# EAGLE board quad (EAGLE 7.5.0)
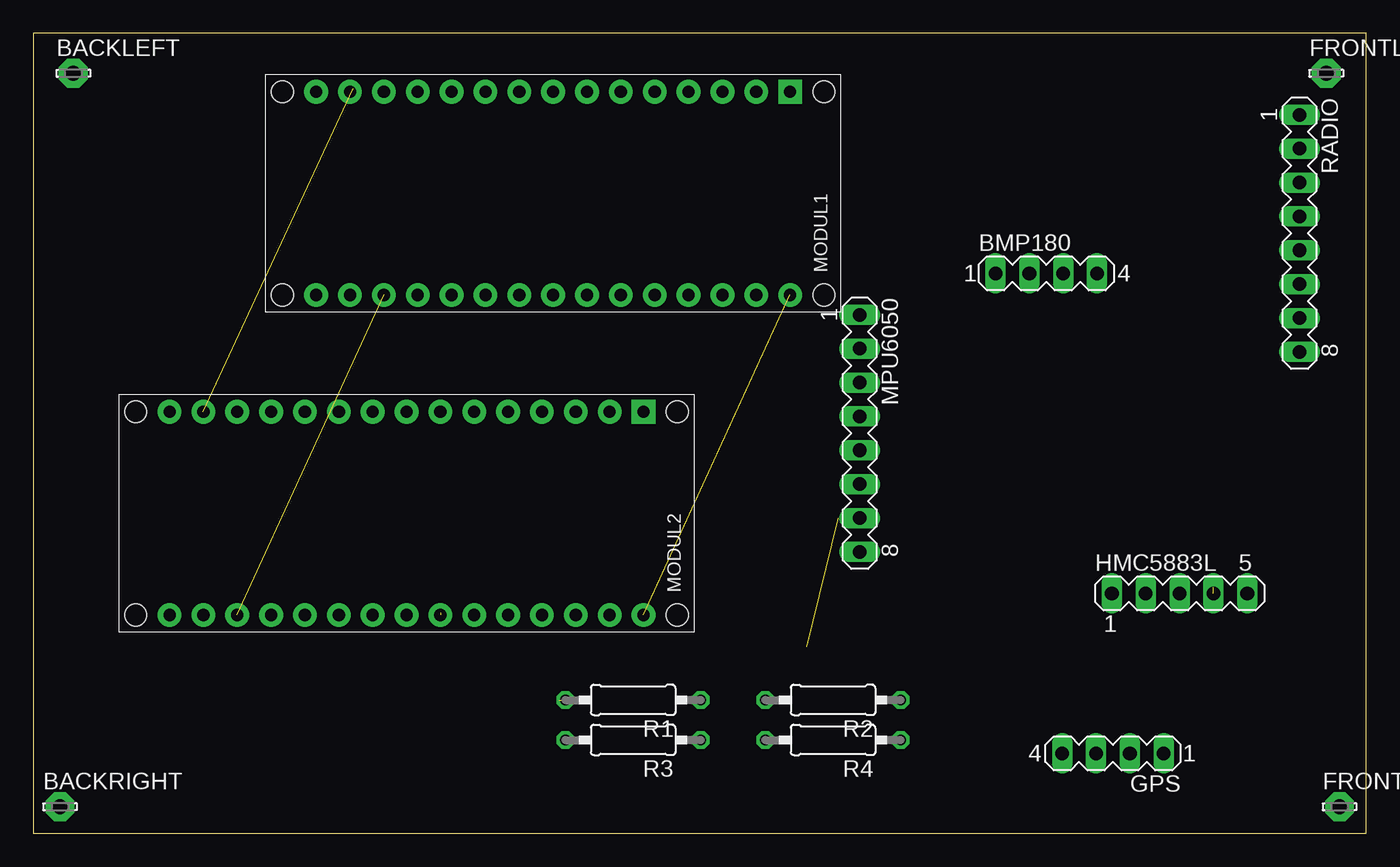
[diagram p0: board, top side]
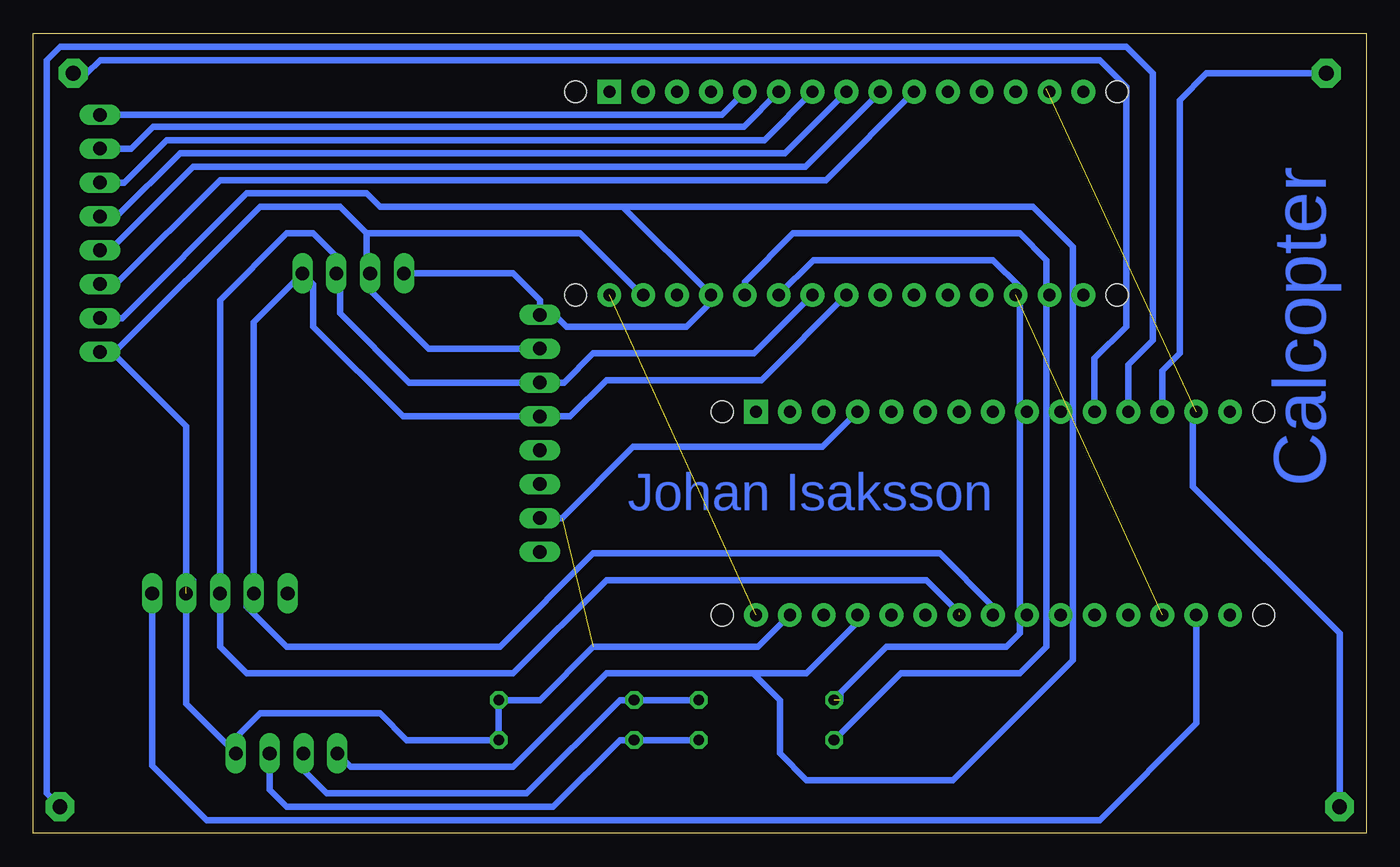
[diagram p1: board, bottom side, seen from below]

Size 100 x 60 mm. Coordinates in mm from the lower left corner, seen from the top.
Outline: 0,0 100,0 100,60 0,60 0,0
Copper layers (1*16): Top 0.035mm / dielectric 1.5mm / Bottom 0.035mm
Design rules "default *": minimum track width 20mil, minimum drill 24mil, track to track 20mil, track to pad 20mil, pad to pad 8mil, via to via 8mil, smd to smd 8mil, copper to edge 40mil, drill to drill 8mil, minimum pad ring 10mil, minimum via ring 8mil, stop-mask expansion 4mil, vias tented up to drill 0mil, thermal gap 10mil

## Footprints (pad centres in the part's own frame; a part is rotated, then mirrored left to right if it is on the bottom)
LSP11 = drill 1.118 pad 2.159 octagon: MP 0,0
MA04-1 = drill 1.016 long: 1 -3.81,0; 2 -1.27,0; 3 1.27,0; 4 3.81,0
MA05-1 = drill 1.016 long: 1 -5.08,0; 2 -2.54,0; 3 0,0; 4 2.54,0; 5 5.08,0
ARDUINO_NANO2 = drill 0.914 pad 1.778 square: J1.1 -7.62,17.78 | drill 0.914 pad 1.778: J1.2 -7.62,15.24; J1.3 -7.62,12.7; J1.4 -7.62,10.16; J1.5 -7.62,7.62; J1.6 -7.62,5.08; J1.7 -7.62,2.54; J1.8 -7.62,0; J1.9 -7.62,-2.54; J1.10 -7.62,-5.08; J1.11 -7.62,-7.62; J1.12 -7.62,-10.16; J1.13 -7.62,-12.7; J1.14 -7.62,-15.24; J1.15 -7.62,-17.78; J2.1 7.62,17.78; J2.2 7.62,15.24; J2.3 7.62,12.7; J2.4 7.62,10.16; J2.5 7.62,7.62; J2.6 7.62,5.08; J2.7 7.62,2.54; J2.8 7.62,0; J2.9 7.62,-2.54; J2.10 7.62,-5.08; J2.11 7.62,-7.62; J2.12 7.62,-10.16; J2.13 7.62,-12.7; J2.14 7.62,-15.24; J2.15 7.62,-17.78 | hole 1.651: -7.62,-20.32; 7.62,-20.32; 7.62,20.32; -7.62,20.32
MA08-1 = drill 1.016 long: 1 -8.89,0; 2 -6.35,0; 3 -3.81,0; 4 -1.27,0; 5 1.27,0; 6 3.81,0; 7 6.35,0; 8 8.89,0
0207/10 = drill 0.813 octagon: 1 -5.08,0; 2 5.08,0

## Placement (x,y rotation side)
BACKLEFT  LSP11  [LSP11]  3,57 0 top
BACKRIGHT  LSP11  [LSP11]  2,2 0 top
BMP180  [MA04-1]  76,42 0 top
FRONTLEFT  LSP11  [LSP11]  97,57 0 top
FRONTRIGHT  LSP11  [LSP11]  98,2 0 top
GPS  [MA04-1]  81,6 180 top
HMC5883L  [MA05-1]  86,18 0 top
MODUL1  ARDUINO_NANO2  [ARDUINO_NANO2]  39,48 270 top
MODUL2  ARDUINO_NANO2  [ARDUINO_NANO2]  28,24 270 top
MPU6050  [MA08-1]  62,30 270 top
R1  [0207/10]  45,10 180 top
R2  [0207/10]  60,10 180 top
R3  [0207/10]  45,7 180 top
R4  [0207/10]  60,7 180 top
RADIO  [MA08-1]  95,45 270 top

## Library data of the parts
BACKLEFT BACKRIGHT FRONTLEFT FRONTRIGHT = solpad
BMP180 GPS HMC5883L MPU6050 RADIO = con-lstb; OC_FARNELL: unknown; OC_NEWARK: unknown
MODUL1 MODUL2 = arduino; ANZAHL: 2; MODUL: TRUE; STECKX0: -76200; STECKX1: 76200; STECKY0: 177800; STECKY1: 177800
R1-R4 = rcl

## Nets
AREF: MODUL1.J2.13 MODUL2.J2.13
COM: MODUL1.J1.4
N$1: FRONTLEFT.MP MODUL2.J1.11
N$2: BMP180.1 GPS.4 MODUL1.J2.4 MODUL2.J2.4 MPU6050.1 RADIO.7
N$3: BACKLEFT.MP MODUL2.J1.13
N$4: BACKRIGHT.MP MODUL2.J1.14
N$5: MODUL1.J1.5 RADIO.1
N$6: FRONTRIGHT.MP MODUL2.J1.12
N$7: MODUL1.J1.6 RADIO.2
N$8: MODUL1.J1.7 RADIO.3
N$9: BMP180.2 GPS.1 HMC5883L.4 MODUL1.J2.2 MODUL2.J1.4 MODUL2.J2.2 MPU6050.2 MPU6050.7 R2.1 R4.1 RADIO.8
N$10: MODUL1.J2.6 R1.2
N$11: MODUL1.J1.8 RADIO.4
N$12: MODUL1.J1.9 RADIO.5
N$13: MODUL1.J1.10 RADIO.6
N$14: HMC5883L.5 MODUL2.J2.14
N$15: MODUL1.J2.14
N$16: BMP180.3 HMC5883L.3 MODUL1.J2.7 MODUL2.J2.7 MPU6050.3
N$17: BMP180.4 HMC5883L.2 MODUL1.J2.8 MODUL2.J2.8 MPU6050.4
N$18: MODUL1.J2.5 R3.2
N$20: GPS.3 R1.1 R2.2
N$21: GPS.2 R3.1 R4.2
VIN: MODUL1.J2.1 MODUL2.J2.1

## Tracks (layer width: path | path; a pad name or v marks a point on that pad's centre or on a via)
AREF  (1 unrouted)
N$1
  Bottom 0.5: FRONTLEFT.MP 96,57 95,58 20,58 18,56 18,38 20.38,35.62 MODUL2.J1.11
N$2
  Bottom 0.5: RADIO.7 93.35,38.65 84,48 75,48 74,47 55.78,47 | BMP180.1 64,42 62,40 MPU6050.1 61.89,39 61,39 60,38 51,38 49.16,39.84 | 49.16,39.84 MODUL1.J2.4 55.78,47 | MODUL2.J2.4 38.16,15.84 42,12 46,12 | 46,12 57,12 64,5 76.19,5 GPS.4 | 49.16,39.84 49,40 | 46,12 44,10 44,6 42,4 31,4 22,13 22,44 25,47 55.78,47
N$3
  Bottom 0.5: BACKLEFT.MP 12,57 14,55 14,36 15.3,34.7 MODUL2.J1.13
N$4  (1 unrouted)
  Bottom 0.5: 24,56 24,55.86 | BACKRIGHT.MP 2,15 13,26 13,31.38 MODUL2.J1.14
N$5
  Bottom 0.5: RADIO.1 48.35,53.89 MODUL1.J1.5
N$6
  Bottom 0.5: FRONTRIGHT.MP 99,3 99,58 98,59 18,59 16,57 16,37 17.84,35.16 MODUL2.J1.12
N$7
  Bottom 0.5: RADIO.2 92.65,51.35 91,53 46.7,53 MODUL1.J1.6
N$8
  Bottom 0.5: RADIO.3 93.19,48.81 90,52 45.16,52 MODUL1.J1.7
N$9  (2 unrouted)
  Bottom 0.5: MPU6050.2 70.35,36.35 75,41 75,41.73 | 75,41.73 BMP180.2 | 88,19 88.54,18.46 | 75,41.73 75,45 | 75,45 77,47 83,47 94,36 | 94,36 94.11,36.11 RADIO.8 | 94,36 88.54,30.54 HMC5883L.4 88.54,9.73 GPS.1 85,6 85,7 83,9 74,9 72,7 R4.1 R2.1 62,10 58,14 45.62,14 MODUL2.J2.2 | MPU6050.7 60.35,23.65 55,29 40.78,29 MODUL2.J1.4 | MODUL1.J2.2 54.38,40.38 59,45 75,45
N$10  (1 unrouted)
  Bottom 0.5: 39.46,10 39.46,10.54 36,14 27,14 26,15 26,41 28,43 41.46,43 MODUL1.J2.6
N$11
  Bottom 0.5: RADIO.4 93.73,46.27 89,51 43.62,51 MODUL1.J1.8
N$12
  Bottom 0.5: RADIO.5 94.27,43.73 88,50 42.08,50 MODUL1.J1.9
N$13
  Bottom 0.5: RADIO.6 93.81,41.19 86,49 40.54,49 MODUL1.J1.10
N$14
  Bottom 0.5: HMC5883L.5 91.08,5.08 87,1 20,1 12.76,8.24 MODUL2.J2.14
N$16  (1 unrouted)
  Bottom 0.5: HMC5883L.3 86,40 81,45 79,45 77,43 77,42.27 BMP180.3 77,41.73 77,39 71.81,33.81 MPU6050.3 60.19,33.81 58,36 45.92,36 MODUL1.J2.7 | 86,17 HMC5883L.3 | 30.54,16.54 33,19 57,19 64,12 84,12 86,14 HMC5883L.3
N$17
  Bottom 0.5: BMP180.4 83.46,38.35 HMC5883L.2 84,17.46 84,17 81,14 65,14 58,21 32,21 28,17 MODUL2.J2.8 | 80,41 80,41.81 BMP180.4 | MODUL1.J2.8 45.38,34 57,34 59.73,31.27 MPU6050.4 72.27,31.27 79,38 79,41.19 BMP180.4
N$18
  Bottom 0.5: MODUL1.J2.5 46.62,41.38 43,45 26,45 24,43 24,14 26,12 34.92,12 R3.2
N$20
  Bottom 0.5: R1.1 R2.2 56,10 63,3 78,3 79.73,4.73 GPS.3
N$21
  Bottom 0.5: GPS.2 82.27,3.27 81,2 61,2 56,7 R4.2 R3.1
VIN  (1 unrouted)

## Text on the board
Bottom: Johan Isaksson | Calcopter